# EAGLE board xerc2-0 (EAGLE 7.5.0)

Size 100 x 80 mm. Coordinates in mm from the lower left corner, seen from the top.
Outline: 0,0 100,0 100,80 0,80 0,0
Copper layers (1*16): Top 0.035mm / dielectric 1.5mm / Bottom 0.035mm
Design rules "default": minimum track width 10mil, minimum drill 24mil, track to track 8mil, track to pad 8mil, pad to pad 8mil, via to via 8mil, smd to smd 8mil, copper to edge 40mil, drill to drill 8mil, minimum pad ring 10mil, minimum via ring 8mil, stop-mask expansion 4mil, vias tented up to drill 0mil, thermal gap 10mil

## Footprints (pad centres in the part's own frame; a part is rotated, then mirrored left to right if it is on the bottom)
0603-CAP = smd 1.1 x 1: 1 -0.85,0; 2 0.85,0
SMD2,54-5,08 = smd 2.54 x 5.08: 1 0,0
SOT23 = smd 1 x 1.4: 1 -0.95,-1.1; 2 0.95,-1.1; 3 0,1.1
0603-RES = smd 1.1 x 1: 1 -0.85,0; 2 0.85,0
SO08-EIAJ = smd 0.61 x 2.21: 1 -1.905,-3.378; 2 -0.635,-3.378; 3 0.635,-3.378; 4 1.905,-3.378; 5 1.905,3.353; 6 0.635,3.353; 7 -0.635,3.353; 8 -1.905,3.353

## Placement (x,y rotation side)
C1  4.7uf  [0603-CAP]  16.51,16.51 0 top
C2  0.1uF  [0603-CAP]  15.24,21.59 0 top
EB  [SMD2,54-5,08]  27.94,3.81 90 top
GND  [SMD2,54-5,08]  5.08,5.08 90 top
IR+  [SMD2,54-5,08]  27.94,22.86 90 top
IR-  [SMD2,54-5,08]  27.94,19.05 90 top
IRD  [SMD2,54-5,08]  27.94,11.43 90 top
MMBT3906  Q1  [SOT23]  19.05,26.67 90 top
PB  [SMD2,54-5,08]  27.94,7.62 90 top
PO  [SMD2,54-5,08]  27.94,15.24 90 top
PWR  [SMD2,54-5,08]  5.08,11.43 90 top
R1  10k  [0603-RES]  21.59,17.78 0 top
R2  10k  [0603-RES]  11.43,16.51 0 top
R3  100  [0603-RES]  21.59,21.59 0 top
R4  10k  [0603-RES]  11.43,20.32 0 top
SL  [SMD2,54-5,08]  27.94,26.67 90 top
U1  Tiny85-20-SMT  [SO08-EIAJ]  15.24,8.89 0 top

## Library data of the parts
C1 = SparkFun-Capacitors
C2 = SparkFun-Capacitors; PROD_ID: CAP-00810
EB GND IR+ IR- IRD PB PO PWR SL = wirepad
MMBT3906 = transistor-pnp
R1 R3 = SparkFun-Resistors
R2 R4 = SparkFun-Passives
U1 = SparkFun-DigitalIC; PROD_ID: IC-09092

## Nets
GND: C1.2 C2.1 GND.1 IR-.1 U1.4
N$1: PB.1 U1.3
N$2: R1.1 U1.1
N$3: EB.1 U1.2
N$4: IRD.1 U1.7
N$5: R2.2 U1.6
N$6: MMBT3906.1 R2.1
N$7: MMBT3906.3 SL.1
N$8: C1.1 IR+.1 R3.2
N$9: R4.2 U1.5
N$10: PO.1 R4.1
VCC: C2.2 MMBT3906.2 PWR.1 R1.2 R3.1 U1.8

## Tracks (layer width: path | path; a pad name or v marks a point on that pad's centre or on a via)
GND  (4 unrouted)
N$1  (1 unrouted)
N$2  (1 unrouted)
N$3  (1 unrouted)
N$4  (1 unrouted)
N$5  (1 unrouted)
N$6  (1 unrouted)
N$7  (1 unrouted)
N$8  (2 unrouted)
N$9  (1 unrouted)
N$10  (1 unrouted)
VCC  (5 unrouted)